# Altium PCB PCB1.PcbDoc
Units mm, origin at the board's own origin, x right, y up, seen from the top; angles counter-clockwise.
Board outline 61.81 x 48.93 mm, 4 copper layers (Top Layer, Layer 1, Layer 2, Bottom Layer), stack 0.603 mm thick; 16 components, 11 nets, 90 pads, 19 vias.
Unrouted connection lines stored in the file: 4.
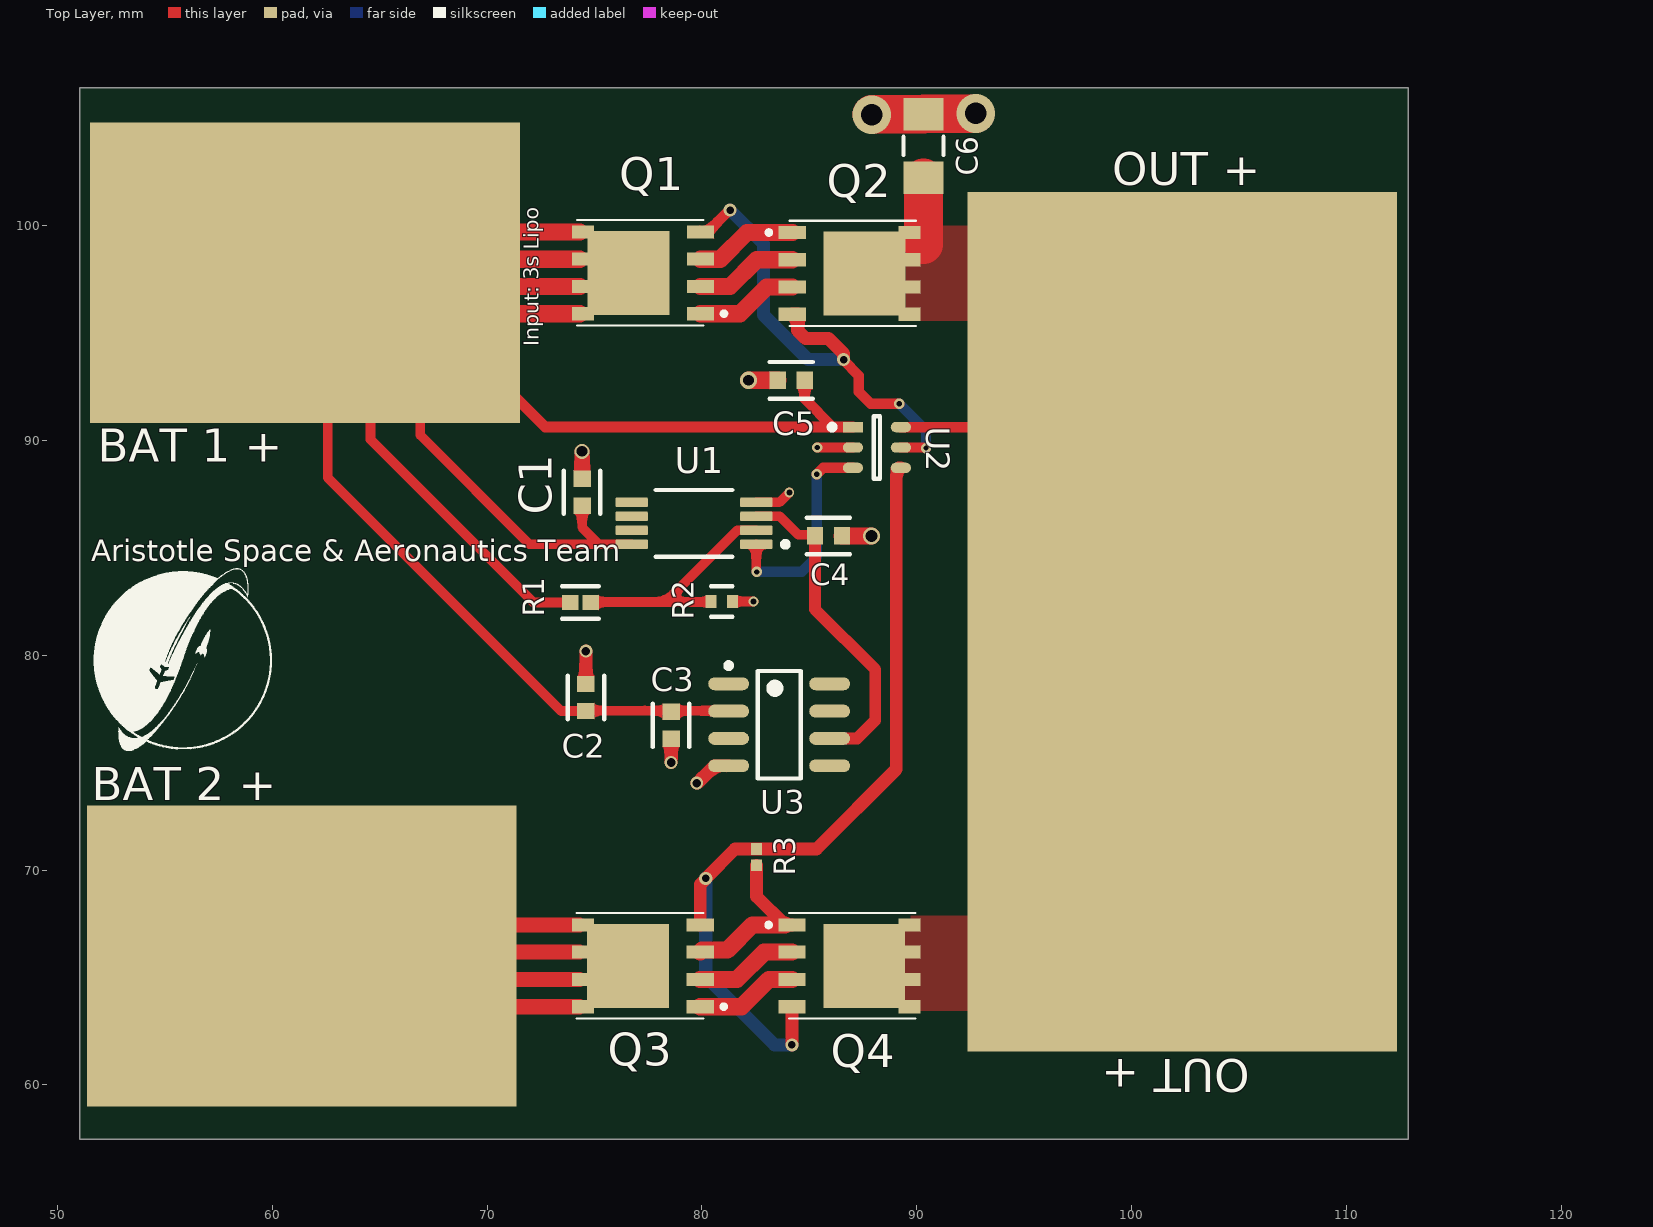
[diagram p0: Top Layer view]
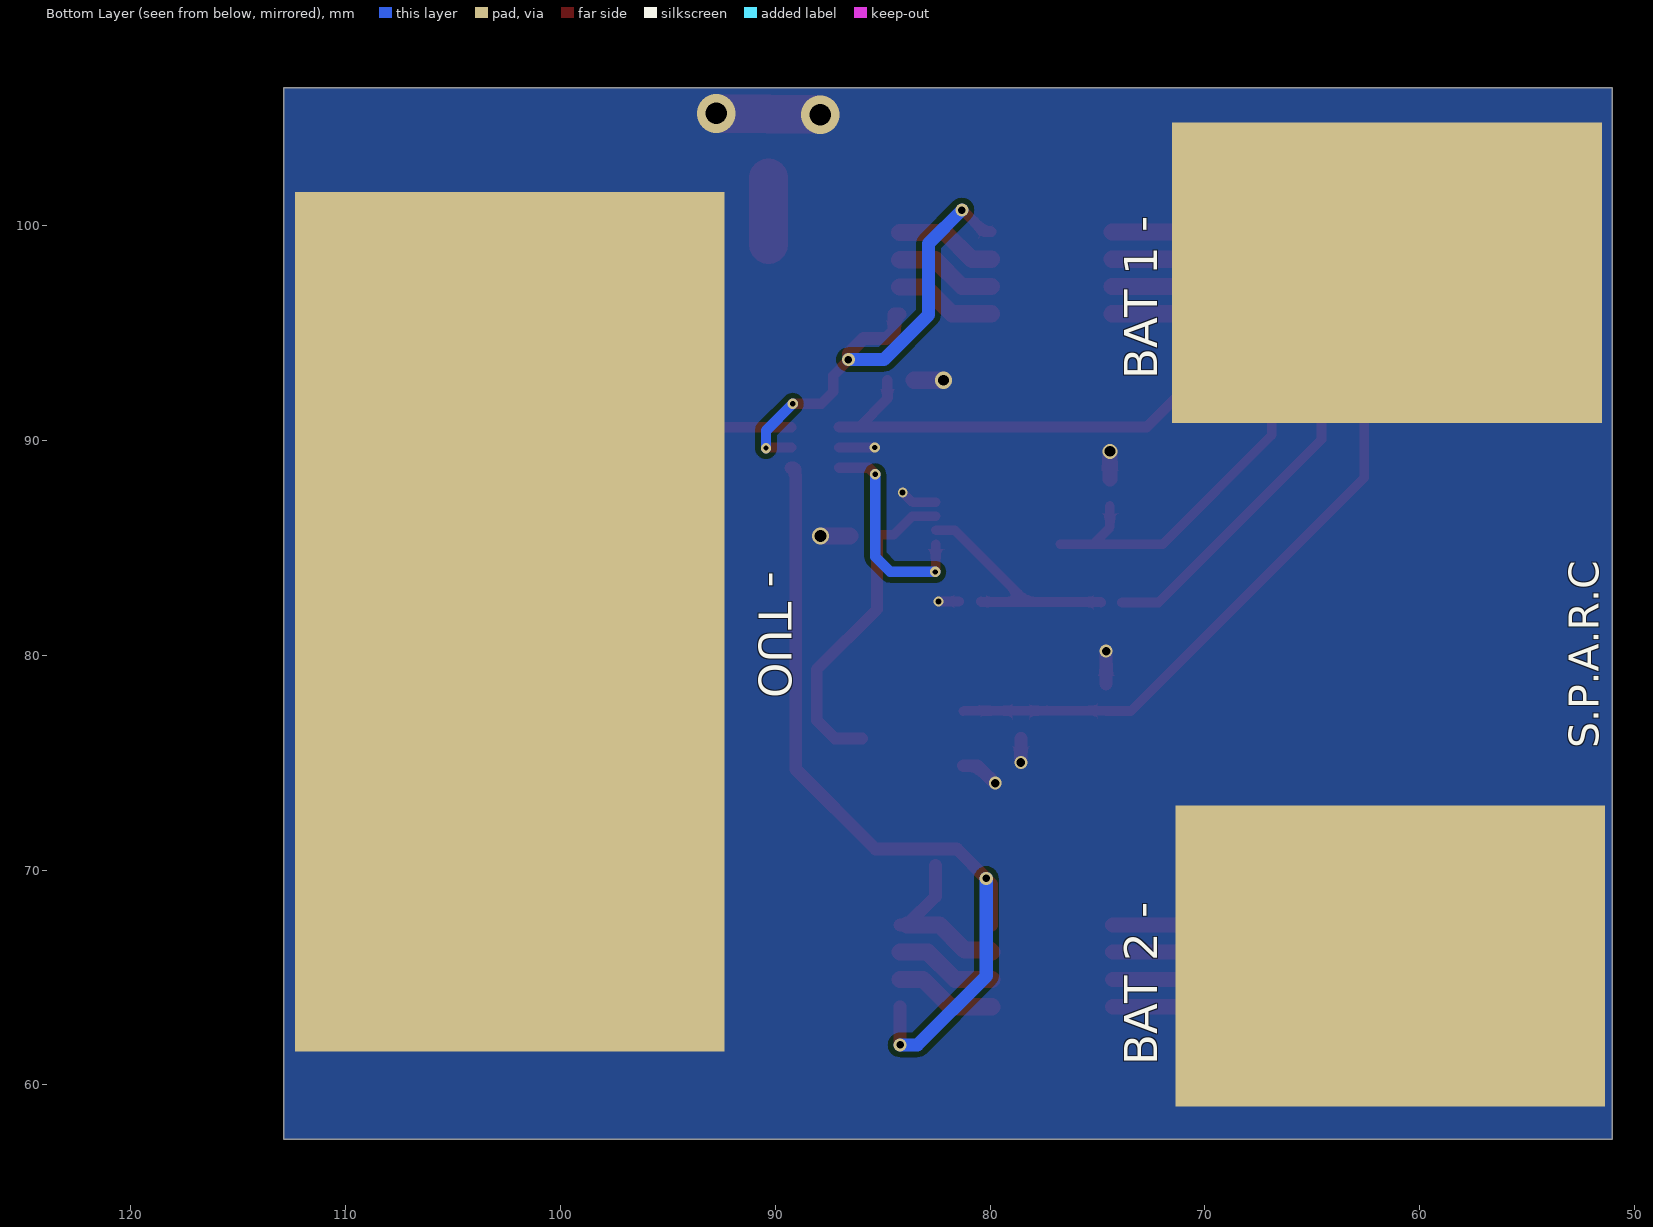
[diagram p1: Bottom Layer view, seen from below]
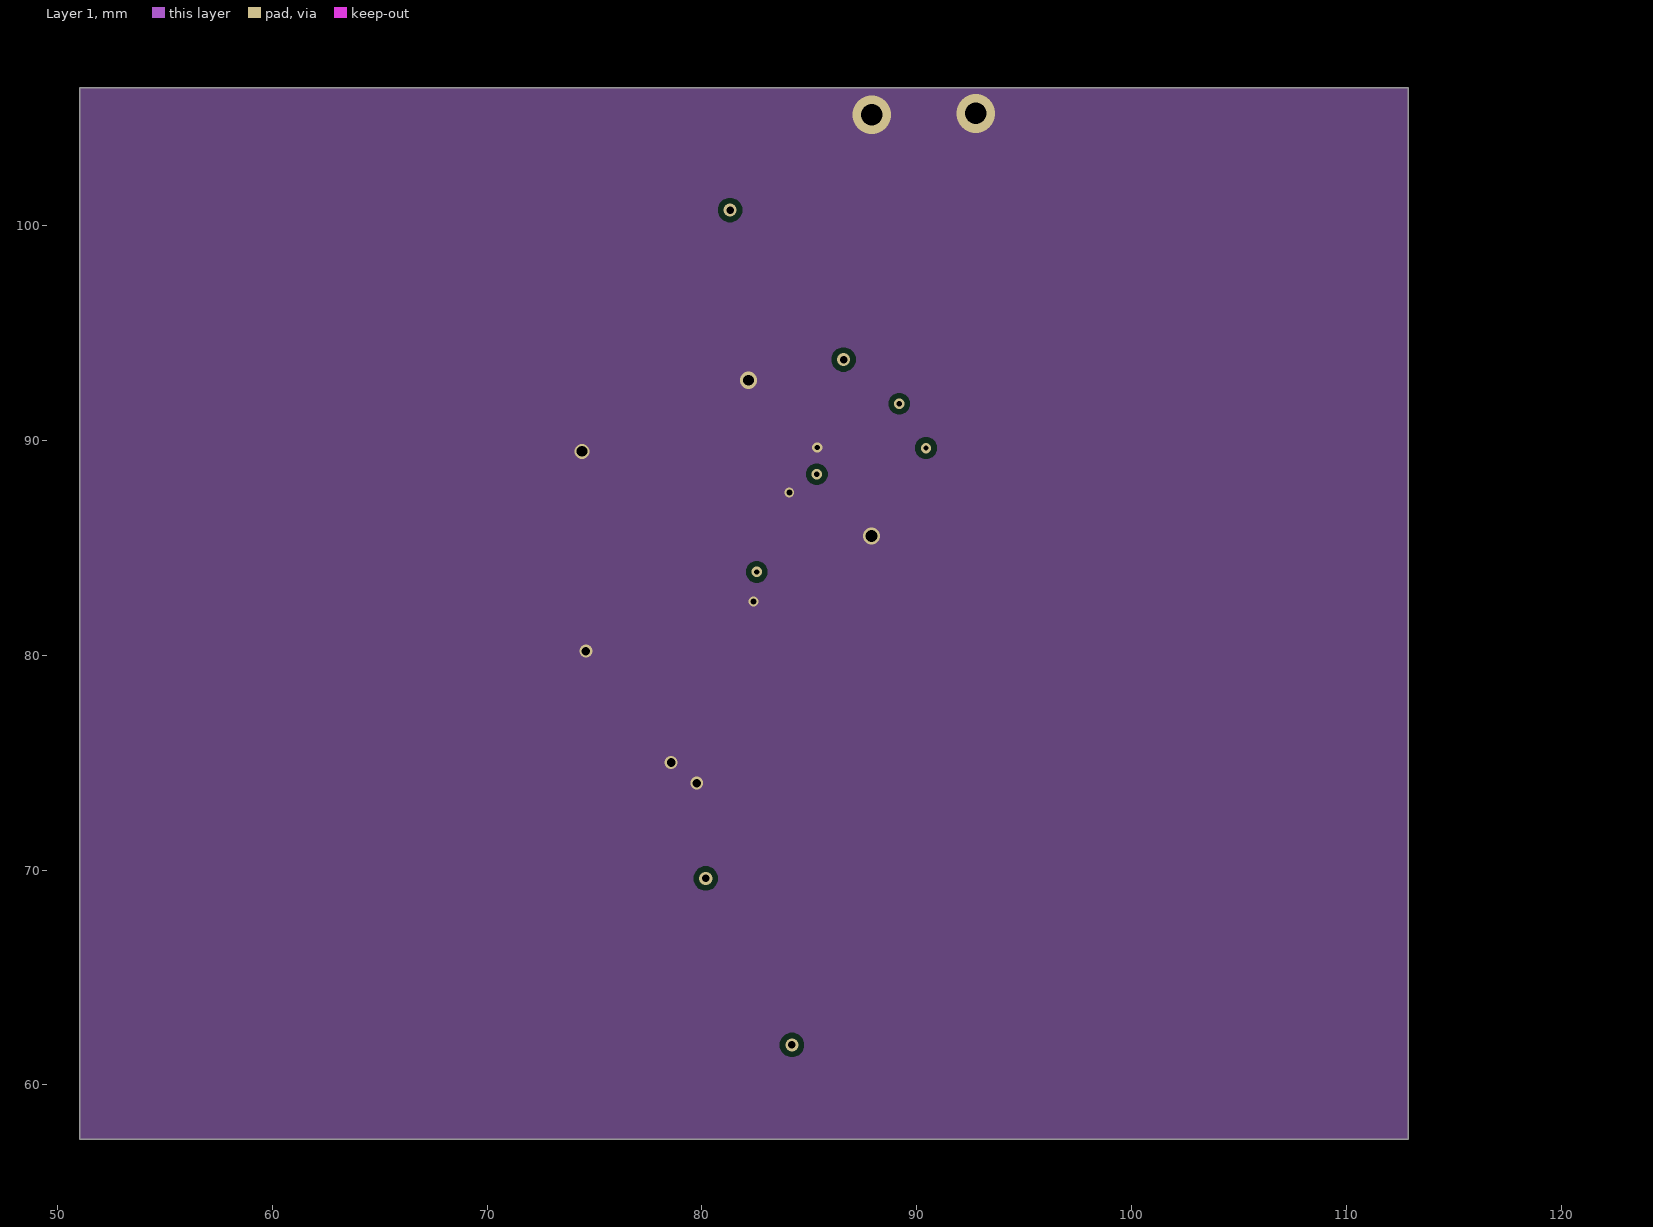
[diagram p2: Layer 1]
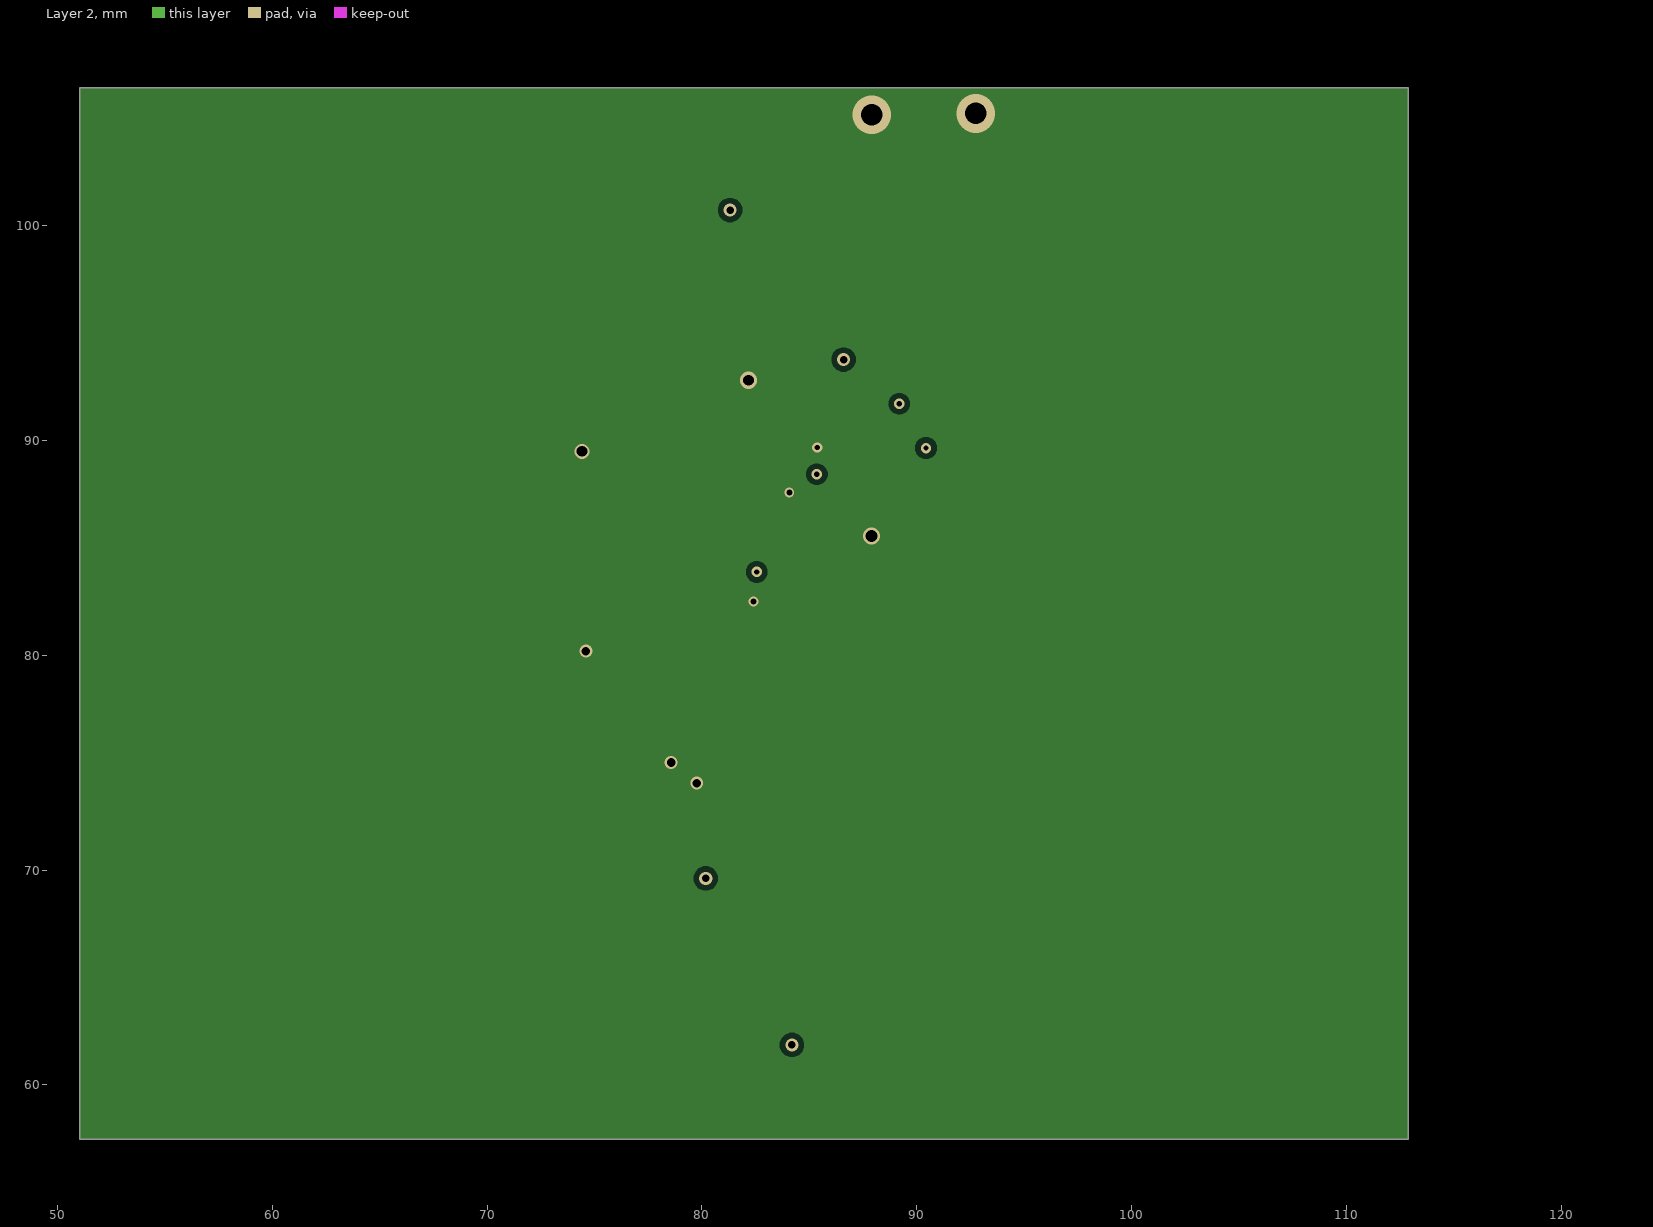
[diagram p3: Layer 2]
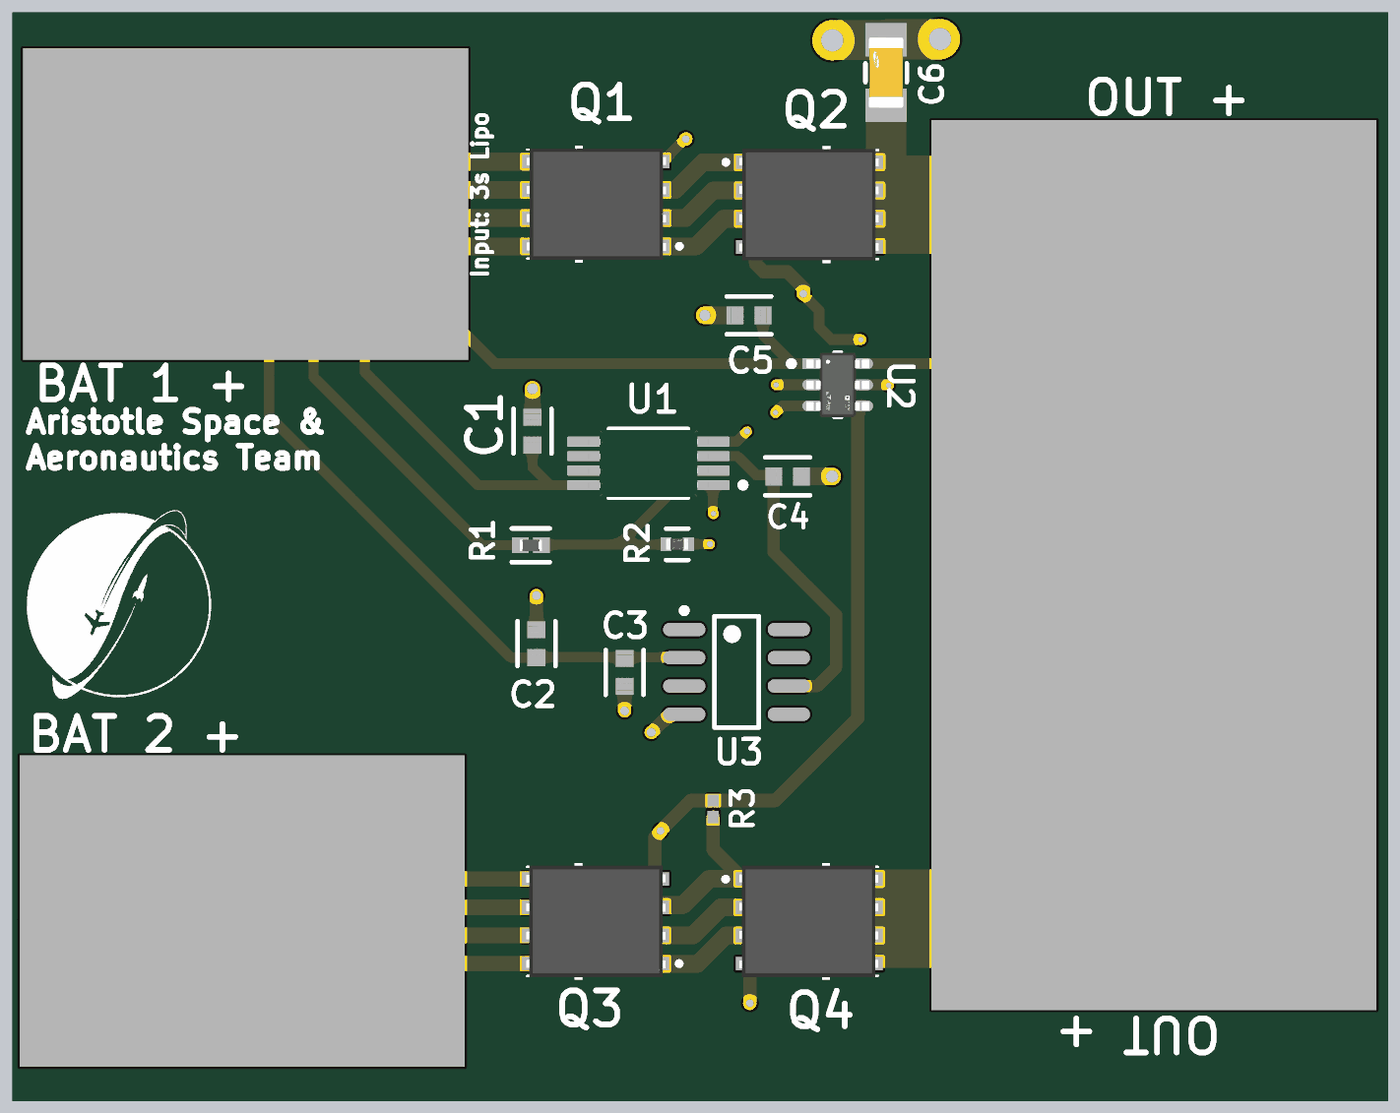
[diagram p4: 3D render of the assembled board from above, using the file's embedded part models]

## Layer stack, top to bottom
Top Solder: solder mask 0.0102, Solder Resist, Dk 3.5
Top Layer: signal copper 0.0356
Dielectric 2: prepreg 0.0711, PP-006, Dk 4.1
Layer 1: signal copper 0.035
Dielectric 1: dielectric 0.32, FR-4, Dk 4.8
Layer 2: signal copper 0.035
Dielectric 3: prepreg 0.0711, PP-006, Dk 4.1
Bottom Layer: signal copper 0.0356
Bottom Solder: solder mask 0.0102, Solder Resist, Dk 3.5

## Board outline
51.054,57.468 112.865,57.468 112.865,106.401 51.054,106.401

## Design rules (kind name [scope] priority, off if disabled: settings)
AssemblyTestPointUsage [All] p1: isadvanced=TRUE
AssemblyTestpoint [All] p1: isadvanced=TRUE testpointundercomponent=TRUE minsize=1.016 maxsize=2.54 preferedsize=1.524 minholesize=0 maxholesize=1.016 preferedholesize=0.813 testpointgrid=0.025 usegrid=TRUE gridtolerance=0 allowsidetop=TRUE allowsidebottom=TRUE
Clearance Clearance_3 [All] p1: isadvanced=TRUE gap=0.254 ignorepadtopadclearanceinfootprint=TRUE except(0: Arc-Hole Track-Hole SMDPad-Hole THPad-Hole Via-Hole Fill-Hole Poly-Hole Region-Hole Text-Hole Hole-Hole; 0.1: Arc-Arc Arc-Track Arc-Text Track-Track Track-Text Text-Text; 0.12: Arc-SMDPad Track-SMDPad SMDPad-Text)
Clearance Clearance_1 [(ExistsOnLayer('Layer 1') Or ExistsOnLayer('Layer 2')) vs (ExistsOnLayer('Layer 1') Or ExistsOnLayer('Layer 2'))] p2: gap=0.254 ignorepadtopadclearanceinfootprint=TRUE sourcerule=42 cellrowname=All cellrowtype=0 cellcolname=All cellcoltype=0 innerlayers=TRUE
Clearance Clearance_2 [(ExistsOnLayer('Top Layer') Or ExistsOnLayer('Bottom Layer')) vs (ExistsOnLayer('Top Layer') Or ExistsOnLayer('Bottom Layer'))] p3: gap=0.254 ignorepadtopadclearanceinfootprint=TRUE sourcerule=42 cellrowname=All cellrowtype=0 cellcolname=All cellcoltype=0 outerlayers=TRUE
Clearance [All] p4: gap=0.254 ignorepadtopadclearanceinfootprint=TRUE ismatrix=TRUE
ComponentClearance [All] p1: isadvanced=TRUE gap=0.254 collisioncheckmode=3 verticalgap=0.254 showdistances=FALSE
FabricationTestPointUsage [All] p1: isadvanced=TRUE valid=0 allowmultiple=FALSE
FabricationTestpoint [All] p1: isadvanced=TRUE side=3 testpointundercomponent=TRUE minsize=1.016 maxsize=2.54 preferedsize=1.524 minholesize=0 maxholesize=1.016 preferedholesize=0.813 testpointgrid=0.025 allowsidetop=TRUE allowsidebottom=TRUE usegrid=TRUE gridtolerance=0
FanoutControl Fanout_BGA [IsBGA] p1: isadvanced=TRUE bgadir=Out bgaviamode=Centered fanoutstyle=Auto fanoutdirection=Alternating viagrid=0.025 // Fanout_BGA (Default Rule)
FanoutControl Fanout_LCC [IsLCC] p2: isadvanced=TRUE bgadir=Out bgaviamode=Centered fanoutstyle=Auto fanoutdirection=Alternating viagrid=0.025 // Fanout_LCC (Default Rule)
FanoutControl Fanout_SOIC [IsSOIC] p3: isadvanced=TRUE bgadir=Out bgaviamode=Centered fanoutstyle=Auto fanoutdirection=Alternating viagrid=0.025 // Fanout_SOIC (Default Rule)
FanoutControl Fanout_Small [(CompPinCount < 5)] p4: isadvanced=TRUE bgadir=Out bgaviamode=Centered fanoutstyle=Auto fanoutdirection=OutThenIn viagrid=0.025 // Fanout_Small (Default Rule)
FanoutControl Fanout_Default [All] p5: isadvanced=TRUE bgadir=Out bgaviamode=Centered fanoutstyle=Auto fanoutdirection=Alternating viagrid=0.025 // Fanout_Default (Default Rule)
Height [All] p1: isadvanced=TRUE minheight=0 maxheight=25.4 prefheight=12.7
HoleSize [All] p1: isadvanced=TRUE absolutevalues=TRUE maxlimit=2.54 minlimit=0.025 maxpercent=80.000 minpercent=20.000
HoleToHoleClearance [All] p1: isadvanced=TRUE gap=0.254 allowstackedmicrovias=TRUE
LayerPairs [All] p1: isadvanced=TRUE enforce=TRUE
MinimumSolderMaskSliver [All] p1: isadvanced=TRUE minsoldermaskwidth=0.254
NetAntennae [All] p1: isadvanced=TRUE netantennaetolerance=0
PasteMaskExpansion [All] p1: isadvanced=TRUE expansion=0
PlaneClearance [All] p1: isadvanced=TRUE clearance=0.508
PlaneConnect [All] p1: isadvanced=TRUE planeconnectstyle=Relief reliefexpansion=0.508 reliefentries=4 reliefconductorwidth=0.254 reliefairgap=0.254
PolygonConnect [All] p1: connectstyle=Direct reliefconductorwidth=0.254 reliefentries=4 polygonreliefangle="90 Angle" airgapwidth=0.254
RoutingCorners [All] p1: isadvanced=TRUE cornerstyle=45-Degree minsetback=2.54 maxsetback=2.54
RoutingPriority [All] p1: isadvanced=TRUE routingpriority=0
RoutingVias [All] p1: holewidth=0.711 width=1.27 viastyle="Through Hole" minholewidth=0.711 minwidth=1.27 maxholewidth=0.711 maxwidth=1.27
ShortCircuit [All] p1: isadvanced=TRUE allowed=FALSE
SilkToSilkClearance [All] p1: isadvanced=TRUE silktosilkclearance=0.254
SilkToSolderMaskClearance [IsPad] p1: isadvanced=TRUE minsilkscreentomaskgap=0.254 clearancetoexposedcopper=TRUE
SolderMaskExpansion [All] p1: isadvanced=TRUE expansion=0.102 istentingtop=FALSE
SupplyNets "Schematic Supply Nets_3" [InNet('BAT1-')] p1: isadvanced=TRUE voltage=0.000
SupplyNets "Schematic Supply Nets_2" [InNet('BAT1-')] p2: isadvanced=TRUE voltage=0.000
SupplyNets "Schematic Supply Nets_1" [InNet('BAT1-')] p3: isadvanced=TRUE voltage=0.000
SupplyNets "Schematic Supply Nets" [InNet('BAT1-')] p4: isadvanced=TRUE voltage=0.000
UnRoutedNet [All] p1: isadvanced=TRUE
UnpouredPolygon [All] p1: isadvanced=TRUE
Width MaxMinWidth_1 [All] p1: isadvanced=TRUE maxlimit=54 minlimit=0.254 preferedwidth=0.254 toplayer_maxwidth=5 midlayer1_maxwidth=0.254 midlayer2_maxwidth=0.254 minimp=50.000000 maximp=50.000000 favimp=50.000000
Width [All] p2: maxlimit=0.254 minlimit=0.254 preferedwidth=0.254
4 further rules are at their usual default settings.

## Classes and differential pairs
component class Main_Circuit: C5 C6 Q2 R3 U2
component class Comparator_Circuit: C1 C2 C3 C4 R1 R2 U1 U3

## Components (designator, comment, footprint, x,y, rotation, side; value= is the part's Value field where it differs from the comment)
C1 "CL10B104KA8NFNC" FP-CL10-IPC_C 74.422,87.579 r270 top
C2 "CL10B104KA8NFNC" FP-CL10-IPC_C 74.6,78.029 r270 top
C3 "CL10B104KA8NFNC" FP-CL10-IPC_C 78.562,76.733 r90 top
C4 "CL10B104KA8NFNC" FP-CL10-IPC_C 85.885,85.547 r180 top
C5 "CL10B104KA8NFNC" FP-CL10-IPC_C 84.15,92.786 r0 top
C6 "CL31A226MOCLNNC" FP-CL31-IPC_A 90.31,103.695 r90 top
Q1 "SIRA99DP-T1-GE3" SI7141DPT1GE3 77.124,97.79 r180 top
Q2 "SIRA99DP-T1-GE3" SI7141DPT1GE3 87.011,97.765 r0 top
Q3 "SIRA99DP-T1-GE3" SI7141DPT1GE3 77.111,65.545 r180 top
Q4 "SIRA99DP-T1-GE3" SI7141DPT1GE3 86.998,65.544 r0 top
R1 "ERA-2AEB472X" FP-ERA2A-IPC_A 74.346,82.448 r0 top
R2 "RT0402BRD075K1L" FP-RT0402-MFG 80.924,82.499 r0 top value=5.1KΩ
R3 "CRG0402F470K" RESC1005X40X25LL10T10 82.537,70.599 r90 top
U1 "LM393BIPWR" FP-PW0008A-MFG 79.629,86.131 r180 top
U2 "LTC4412ES6#TRMPBF" FP-S6-6-05-08-1636-IPC_C 88.138,89.662 r0 top
U3 "ADR02BRZ" ADI-R-8_L 83.591,76.759 r0 top

## Footprints (in the part's own frame and the unit in brackets; to place one, negate y for a bottom-side part, rotate by r counter-clockwise, add the part's x,y. Pads: shape width x height; smd on the part's side, far side on the other; paste and mask are expansions set on the pad)
ADI-R-8_L [mm] "SOIC, 8-Leads, Body 4.9x3.9mm, Pitch 1.27mm, IPC High Density"
  oval 1.9x0.6 smd: 1(-2.35,1.905) 2(-2.35,0.635) 3(-2.35,-0.635) 4(-2.35,-1.905) 5(2.35,-1.905) 6(2.35,-0.635) 7(2.35,0.635) 8(2.35,1.905)
  silkscreen extent -2.47,-2.5 1,2.88, body extent -2,-2.5 2,2.5, height 1.75
FP-CL10-IPC_C [mm]
  rect 0.758x0.812 smd paste+0 mask+0: 1(-0.627,0) 2(0.627,0)
  silkscreen extent -1.01,-0.85 1.01,0.85, body extent -1.11,-0.55 1.11,0.55, height 0.25
FP-CL31-IPC_A [mm]
  rect 1.505x1.858 smd paste+0 mask+0: 1(-1.476,0) 2(1.476,0)
  silkscreen extent -0.42,-0.93 0.42,0.93, body extent -2.73,-1.43 2.73,1.43, height 0.25
FP-ERA2A-IPC_A [mm]
  rect 0.76x0.716 smd paste+0 mask+0: 1(-0.476,0) 2(0.476,0)
  silkscreen extent -0.86,-0.76 0.86,0.76, body extent -1.06,-0.56 1.06,0.56, height 0.25
FP-PW0008A-MFG [mm]
  rrect22% 1.5x0.45 smd paste+0 mask+0: 1(-2.9,0.975) 2(-2.9,0.325) 3(-2.9,-0.325) 4(-2.9,-0.975) 5(2.9,-0.975) 6(2.9,-0.325) 7(2.9,0.325) 8(2.9,0.975)
  silkscreen extent -4.38,-1.55 1.77,1.55, body extent -3.75,-1.8 3.75,1.8, height 0.25
FP-RT0402-MFG [mm]
  rect 0.5x0.6 smd paste+0 mask+0: 1(-0.5,0) 2(0.5,0)
  silkscreen extent -0.5,-0.71 0.5,0.7, body extent -0.85,-0.4 0.85,0.4, height 0.25
FP-S6-6-05-08-1636-IPC_C [mm]
  rect 0.94x0.486 smd paste+0 mask+0: 1(-1.115,0.95)
  rrect100% 0.94x0.486 smd paste+0 mask+0: 2(-1.115,0) 3(-1.115,-0.95) 4(1.116,-0.95) 5(1.116,0) 6(1.116,0.95)
  silkscreen extent -2.21,-1.45 0.15,1.45, body extent -1.69,-1.55 1.69,1.55, height 0.25
RESC1005X40X25LL10T10 [mm] "Chip Resistor, 2-Leads, Body 1.00x0.50mm, IPC High Density"
  rect 0.55x0.5 smd: 1(-0.375,0) 2(0.375,0)
  body extent -0.55,-0.3 0.55,0.3, height 0.4
SI7141DPT1GE3 [mm]
  rect 1.27x0.61 smd: 1(-2.81,1.905) 2(-2.81,0.635) 3(-2.81,-0.635) 4(-2.81,-1.905)
  rect 0.71x0.61 smd: 5(2.81,-1.905) 6(2.81,-0.635) 7(2.81,0.635) 8(2.81,1.905)
  rect 3.81x3.91 smd: 9(0.55,0)
  rect 0.32x0.255 smd: 10(2.3,2.083) 11(2.3,-2.083)
  silkscreen extent -4,-2.45 2.95,2.45, body extent -3.29,-2.63 2.96,2.63, height 1.12

## Part data
C1 C2 C3 C4 C5: library part CMP-13271-001423-1, "Cap Ceramic 100nF 25V X7R ±10% Pad SMD 0603 +125°C T/R", Capacitance=100nF, Case Code (Imperial)=0603, Case Code (Metric)=1608, Dielectric=X7R, Max Operating Temperature=125°C, Min Operating Temperature=-55°C, Tolerance=10%, Voltage Rating=25V, Case/Package=0603, Depth=0.8mm, Height=0.8mm, Length=1.6mm, Mount="Surface Mount", Packaging="Tape and Reel", Radiation Hardening=No, Thickness=0.035inch, Width=0.031inch
C6: library part CMP-13271-002013-1, "Cap Ceramic 22uF 16V X5R ±20% SMD 1206 +85°C Embossed T/R", Capacitance=22uF, Case Code (Imperial)=1206, Case Code (Metric)=3216, Dielectric=X5R, Max Operating Temperature=85°C, Min Operating Temperature=-55°C, Package Quantity=1, Tolerance=20%, Voltage=16V, Case/Package=1206, Depth=1.6mm, Height=0.85mm, Lead Free="Lead Free", Length=3.2mm, Mount="Surface Mount", Packaging="Tape and Reel", Radiation Hardening=No, Thickness=0.037inch, Voltage Rating=16V, Width=0.063inch
Q1 Q2 Q3 Q4: "MOSFET (P-Channel)", Manufacturer_Name=Vishay, Mouser Part Number=78-SIRA99DP-T1-GE3, Arrow Part Number=SIRA99DP-T1-GE3, Arrow Price/Stock=https://www.arrow.com/en/products/sira99dp-t1-ge3/vishay?region=nac, Datasheet Link=https://www.vishay.com/docs/71023/sira99dp.pdf, Manufacturer_Part_Number=SIRA99DP-T1-GE3, Mouser Price/Stock=https://www.mouser.co.uk/ProductDetail/Vishay-Semiconductors/SIRA99DP-T1-GE3?qs=UkDUCjYnTB2B5E%2FMLQOT2A%3D%3D
R1: library part CMP-2002-05888-2, "RES SMD 4.7K OHM 0.1% 1/16W 0402", Case Code (Imperial)=0402, Case Code (Metric)=1005, Max Operating Temperature=155°C, Max Power Dissipation=63mW, Min Operating Temperature=-55°C, Package Quantity=1, Resistance=4.7kR, Resistance Tolerance=0.1%, Resistor Type="Thin Film", Temperature Coefficient=25ppm/°C, Voltage Rating=25V, Case/Package=0402, Construction=Rectangular, Contact Plating=Tin, Depth=0.5mm, Height=0.35mm, Lead Free="Lead Free", Length=1mm, Military Standard=Not, Mount="Surface Mount", Number of Pins=2, Number of Terminations=2, Packaging="Tape and Reel", Power Rating=63mW, Radiation Hardening=No, REACH SVHC="No SVHC", RoHS Compliant=Yes, Series=ERA-2A, Size Code=0402, Technology="METAL FILM", Termination=SMD/SMT, Tolerance=0.1%, Voltage Rating (DC)=25V, Width=0.02inch
R2: library part CMP-2002-02959-2, "RES SMD 5.1K OHM 0.1% 1/16W 0402", Manufacturer=Yageo, Package=RT0402, Power Rating=0.063W, Resistance=5.1KΩ, Temperature="-55°C to +155°C", Temperature Coefficient="25 ppm/°C", Temperature Range High=+155°C, Temperature Range Low=-55°C, Tolerance=0.001, Voltage Rating=50V, Automotive=No, Category=Res, ComponentLink2Description=Datasheet, ComponentLink2URL=http://www.yageo.com/documents/recent/PYu-RT_1-to-0.01_RoHS_L_9.pdf, Composition="Thin Film", Device Class L1="Passive Components", Device Class L2=Resistors, Device Class L3="Chip SMD Resistors", Digikey Description="RES SMD 5.1K OHM 0.1% 1/16W 0402", Footprint Url=http://www.yageo.com/exep/pages/download/literatures/PYu-R_Mount_10.pdf, Height=0.35mm, Ipc Land Pattern Name=RESC10050X30, Lead Free=Yes, Manufacturer Part Number=RT0402BRD075K1L, Mouser Description="Thin Film Resistors 1/16W 5.1K ohm .1% 25ppm", Octopart=https://octopart.com/rt0402brd075k1l-yageo-1430932, RoHS=TRUE, Series=RT
R3: library part CMP-2002-05737-1, Manufacturer="TE Connectivity / AMP", Part Number=CRG0402F470K
U1: library part CMP-04896-000024-1, "Dual Comparators", Ambient Temperature Range High=+85°C, Ambient Temperature Range Low=-40°C, Input Bias Current=0.0035uA, Input Offset Voltage=4mV, Manufacturer="Texas Instruments", Max Junction Temp=+150°C, Max Supply Voltage=36V, Min Supply Voltage=3V, Nominal Supply Current=550uA, Output Current Per Channel=25mA, Package=PW0008A, Temperature="-40°C to +85°C", Automotive=No, Category=IC, ComponentLink2Description=Datasheet, ComponentLink2URL=http://www.ti.com/lit/ds/symlink/lm393b.pdf, Device Class L1="Integrated Circuits (ICs)", Device Class L2="Linear ICs", Device Class L3=Comparators, Height=1.2mm, Lead Free=Yes, Manufacturer Part Number=LM393BIPWR, Number Of Channels=2, Octopart=https://octopart.com/lm393bipwr-texas+instruments-107383910, Response Time=1us, RoHS=TRUE, Standoff Height=0.05mm, Temperature Range High=+85°C, Temperature Range Low=-40°C
U2: library part CMP-0479-00425-2, "IC OR CTRLR SRC SELECT TSOT23-6", Case/Package=TSOT, Max Operating Temperature=85°C, Max Supply Voltage=28V, Min Operating Temperature=-40°C, Min Supply Voltage=2.5V, Package Quantity=1, Height=0.9mm, Lead Free="Lead Free", Length=2.9mm, Number Of Channels=1, Number of Outputs=1, Number of Pins=6, Packaging="Tape and Reel", Radiation Hardening=No, REACH SVHC="No SVHC", RoHS Compliant=Yes, Series=PowerPath™, Turn-On Delay Time=110us, Width=1.75mm
U3: library part CMP-0784-00328-1, "Ultracompact, Precision Voltage Reference, 5 V Output, 7 to 36 V Supply, Industrial, 8-pin SOIC (R-8), Tube", Manufacturer="Analog Devices", Operating Temp Range="-40 to 125 degC", Automotive Qualified=Yes, Code_JEDEC=MS-012-AA, ComponentLink1Description="Manufacturer URL", ComponentLink1URL=http://www.analog.com/en/index.html, ComponentLink2Description=Datasheet, ComponentLink2URL=http://www.analog.com/static/imported-files/data_sheets/ADR01_02_03_06.pdf, ComponentLink3Description="Package Specification", ComponentLink3URL=http://www.analog.com/static/imported-files/packages/PKG_PDF/SOIC_Narrow%20(R)/R_8.pdf, ComponentLink4Description="URL Link1", ComponentLink4URL="Product URL:http://www.analog.com/en/special-linear-functions/voltage-references/adr02/products/product.html", DatasheetVersion="Rev. R", Max V Supply (V)=36, Min V Supply (V)=7, Mounting Technology="Surface Mount", PackageDescription="8-Pin Standard Small Outline Package, Body 4.9 x 3.9 mm, Pitch 1.27 mm", PackageReference=R-8, PackageVersion="060506-A, 06/2006", Packing=Tube, PartNumber=ADR02BRZ, Ref Out TC (ppm/C)=1, Vout=5V

## Free pads (board coordinates)
  rect 20x40 smd far side: 2(102.349,81.559)
  rect 20x40 smd: 2(102.349,81.559)
  rect 20x14 smd far side: 6(61.379,66.002) 6(61.532,97.79)
  rect 20x14 smd: 6(61.379,66.002) 6(61.531,97.79)

## Via types
v1: diameter 0.486, hole 0.245, Top Layer to Bottom Layer, 5 vias
v2: diameter 0.61, hole 0.35, Top Layer to Bottom Layer, 4 vias
v3: diameter 0.6, hole 0.4, Top Layer to Bottom Layer, 3 vias
v4: diameter 1.8, hole 1, Top Layer to Bottom Layer, 2 vias
v5: diameter 0.45, hole 0.28, Top Layer to Bottom Layer, 2 vias
v6: diameter 0.8, hole 0.55, Top Layer to Bottom Layer, 1 vias
v7: diameter 0.8, hole 0.5, Top Layer to Bottom Layer, 1 vias
v8: diameter 0.7, hole 0.5, Top Layer to Bottom Layer, 1 vias

## Nets (pads, with @x,y where several pads share a name; then routed paths per layer and width w, separated by ;. In a path a pad name is that pad's centre, name@x,y a point inside that pad or via, vN(x,y) a via of type N, cw(c..) or ccw(c..) an arc to the next point about the centre after c; other vN are vias at no path point)
BAT1+: C1.2 C2.2 C3.2 C5.2 pad.6@61.531,97.79 Q1.5 Q1.6 Q1.7 Q1.8 Q1.9 Q1.10 Q1.11 R1.1 U1.8 U2.1 U3.2 | length 143.7
  Top Layer w0.45: pad.6@61.531,97.79 62.586,96.736 62.586,88.265 73.449,77.402 C2.2 74.617,77.419 77.326,77.419 77.343,77.437 77.364,77.415 81.22,77.415 U3.2 ; pad.6@62.179,99.695 61.643,97.759 61.531,97.358 61.712,97.692 62.027,98.273 pad.6@63.449,96.85 ; pad.6@66.396,92.275 66.891,91.78 66.891,90.233 71.968,85.156 75.209,85.156 ; pad.6@67.437,95.885 64.414,95.885 pad.6@63.449,96.85 ; R1.1 72.161,82.448 64.579,90.03 64.579,95.72 pad.6@63.449,96.85 ; C1.2 74.422,85.944 75.209,85.156 ; U1.8 75.209,85.156
  Top Layer w0.486: C5.2 84.777,91.928 86.093,90.612
  Top Layer w0.5: pad.6@64.897,98.425 67.437,95.885 68.656,94.666 68.656,94.643 71.142,92.158 71.164,92.158 72.71,90.612 86.093,90.612 U2.1
  Top Layer w0.8: pad.6@62.179,99.695 Q1.5 ; pad.6@64.897,98.425 Q1.6 ; pad.6@66.144,97.155 Q1.7 ; pad.6@67.437,95.885 Q1.8
BAT1-: C1.1 C2.1 C3.1 C4.1 C5.1 C6.2 pad.2@102.349,81.559 pad.6@61.379,66.002 pad.6@61.532,97.79 R2.2 U1.4 U2.2 U3.4 | length 17.7
  Top Layer w0.45: R2.2 v5(82.398,82.499) ; U1.4 83.601,87.106 v5(84.065,87.57)
  Top Layer w0.486: v1(85.369,89.662) U2.2
  Top Layer w0.6: C2.1 v3(74.6,80.188) ; v3(78.562,75.006) C3.1 C3.1@78.562,76.133 ; v3(79.756,74.041) 79.779,74.041 80.591,74.854 U3.4
  Top Layer w0.7: C1.1 v8(74.422,89.484)
  Top Layer w0.8: v7(82.169,92.786) C5.1 ; C4.1 v6(87.884,85.547) ; C6.2 C6.2@90.327,105.189 ; v4@92.718,105.189 v4(92.735,105.207)
  Top Layer w1.8: v4@87.91,105.163 C6.2@90.301,105.163 ; C6.2@90.327,105.189 v4@92.718,105.189
  other v4: 87.893,105.146
BAT2+: pad.6@61.379,66.002 Q3.5 Q3.6 Q3.7 Q3.8 Q3.9 Q3.10 Q3.11 | length 59.9
  Top Layer w0.7: Q3.8 61.76,63.64 pad.6@60.49,64.91 ; Q3.7 pad.6@60.49,64.91 ; Q3.6 pad.6@59.576,66.18 ; Q3.5 60.846,67.45 pad.6@59.576,66.18 ; pad.6@59.576,66.18 59.398,66.002 pad.6@60.49,64.91
CTL: U1.1 U2.3 | length 10
  Top Layer w0.45: U1.1 82.529,83.902 82.55,83.881 v1(82.55,83.871)
  Top Layer w0.486: v1(85.344,88.417) 85.639,88.712 U2.3
  Bottom Layer w0.486: v1(82.55,83.871) 84.633,83.871 85.344,84.582 v1(85.344,88.417)
GATE_1: Q1.4 Q2.4 U2.5 | length 23.4
  Top Layer w0.486: Q1.4 80.264,99.695 81.28,100.711 v2(81.305,100.711) ; v2(86.589,93.751) 86.589,93.718 87.3,93.007 87.3,92.253 87.859,91.694 v1(89.179,91.694) ; U2.5 90.399,89.662 v1(90.424,89.637)
  Top Layer w0.61: Q2.4 Q2.4@84.454,95.86 ; Q2.4@84.454,95.859 84.454,95.099 84.812,94.742 85.877,94.742 86.589,94.031 v2(86.589,93.751)
  Bottom Layer w0.486: v1(89.179,91.694) 90.424,90.449 v1(90.424,89.637)
  Bottom Layer w0.61: v2(81.305,100.711) 82.855,99.162 82.855,95.834 84.938,93.751 v2(86.589,93.751)
GATE_2: Q3.4 Q4.4 R3.2 U2.4 | length 39.1
  Top Layer w0.5: v2@80.175,69.579 v2(80.175,69.609)
  Top Layer w0.6: Q3.4 79.921,69.325 v2@80.175,69.579 ; v2(80.175,69.609) 81.541,70.974 R3.2 85.325,70.974 89.04,74.689 89.04,88.361 89.084,88.404 89.084,88.655 89.141,88.712 U2.4 ; v2(84.188,61.862) Q4.4
  Bottom Layer w0.61: v2(80.175,69.609) 80.175,65.062 83.376,61.862 v2(84.188,61.862)
LOAD: C6.1 pad.2@102.349,81.559 Q2.5 Q2.6 Q2.7 Q2.8 Q2.9 Q2.10 Q2.11 Q4.5 Q4.6 Q4.7 Q4.8 Q4.9 U2.6 | length 33.8
  Top Layer w0.486: U2.6 93.297,90.612 pad.2@102.349,81.559 ; pad.2@96.078,90.612 102.972,82.062 pad.2@104.75,79.858
  Top Layer w1.8: 90.31,99.111 C6.1
NetQ1_1: Q1.1 Q1.2 Q1.3 Q2.1 Q2.2 Q2.3 | length 14.3
  Top Layer w0.8: Q1.1 81.769,95.885 83.013,97.13 Q2.3 ; Q1.2 81.305,97.155 82.55,98.4 Q2.2 ; Q1.3 80.848,98.425 82.093,99.67 Q2.1
NetQ3_1: Q3.1 Q3.2 Q3.3 Q4.1 Q4.2 Q4.3 R3.1 | length 17.7
  Top Layer w0.6: R3.1 82.537,68.77 83.858,67.449 Q4.1
  Top Layer w0.8: Q3.1 81.843,63.64 83.113,64.909 Q4.3 ; Q3.2 81.623,64.91 82.893,66.179 Q4.2 ; Q3.3 80.016,66.275 81.179,66.275 82.353,67.449 Q4.1@83.858,67.449
VoltDiv: R1.2 R2.1 U1.2 | length 11.2
  Top Layer w0.45: R1.2 74.847,82.474 78.308,82.474 ; R2.1 80.399,82.474 78.308,82.474 ; U1.2 81.641,85.806 78.308,82.474
Vref: C4.2 U1.3 U3.6 | length 15.3
  Top Layer w0.45: U1.3 83.622,86.456 84.475,85.603 85.202,85.603 C4.2
  Top Layer w0.55: C4.2 85.258,82.138 88.062,79.335 88.062,76.962 87.224,76.124 U3.6
pads on no net: Q4.10 Q4.11 U1.5 U1.6 U1.7 U3.1 U3.3 U3.5 U3.7 U3.8

## Polygon pours and split planes (outlines as drawn)
LOAD on Top Layer "NONET_L-01_P-001" (solid, pour order 34): 89.463,67.882 89.463,63.462 92.455,63.462 92.455,67.882
LOAD on Top Layer "NONET_L-01_P-001" (solid, pour order 25): 89.476,99.974 89.476,95.555 92.569,95.555 92.569,99.974
BAT1- on Layer 2 "BAT1-_L03_P041" (solid, pour order 41): 51.054,57.468 112.865,57.468 112.865,106.401 51.054,106.401
BAT1- on Layer 1 "BAT1-_L02_P040" (solid, pour order 40): 51.054,57.468 112.865,57.468 112.865,106.401 51.054,106.401
BAT1- on Bottom Layer "BAT1-_L04_P042" (solid, pour order 42): 51.054,57.468 112.865,57.468 112.865,106.401 51.054,106.401

## Silkscreen, mask and mechanical layers (free items; w line width, h text height)
Top Overlay:
  drawing of 3 lines, arcs and shapes, not listed
  text "OUT +" at 99.085,101.854 h1.52
  text "Input: 3s Lipo" at 72.396,94.376 h0.7 r90
  text "BAT 1 +" at 51.892,89.002 h1.52
  text "Aristotle Space & Aeronautics Team" at 51.575,84.366 h1
  text "BAT 2 +" at 51.613,73.241 h1.52
  text "OUT +" at 105.486,61.189 h1.52 r180
Bottom Overlay:
  text "BAT 1 -" at 72.212,92.839 h1.52 r270
  text "OUT -" at 90.754,78.004 h1.52 r90
  text "S.P.A.R.C" at 51.676,75.667 h1.4 r270
  text "BAT 2 -" at 72.212,60.924 h1.52 r270